# Altium PCB 6_LDCU_connector board(V21_zb).PcbDoc (part 2 of 4)
Units mil, origin at the board's own origin, x right, y up, seen from the top; angles counter-clockwise.
Board outline 11811.02 x 4135 mil, 2 copper layers (Top, Bottom), stack 12.7 mil thick; 37 components, 473 nets, 963 pads, 1 vias.
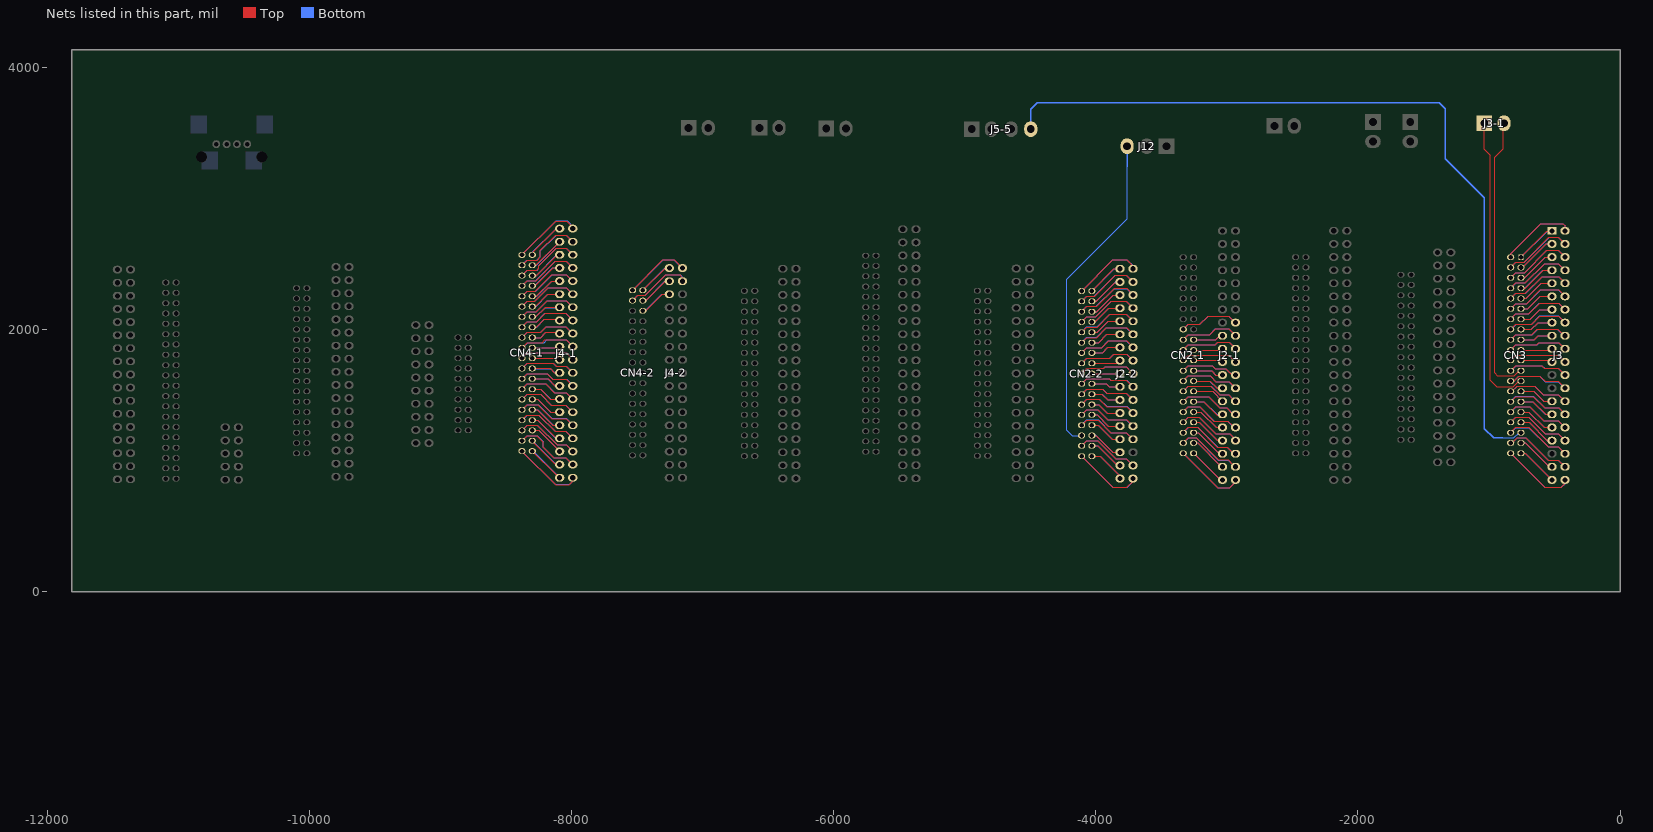
[diagram p2: the nets of this part, all layers, seen from the top]

## Via types
v1: diameter 20, hole 14, Top to Bottom, 1 vias

## Nets (pads, with @x,y where several pads share a name; then routed paths per layer and width w, separated by ;. In a path a pad name is that pad's centre, name@x,y a point inside that pad or via, vN(x,y) a via of type N, cw(c..) or ccw(c..) an arc to the next point about the centre after c; other vN are vias at no path point) (continued)
CN2-1_P16: CN2-1.16 J2-1.16 | length 925.3
  Top w7.87: CN2-1.16@-3333.03,2002.28 -3293.66,2041.65 -3205.47,2041.65 -3142.48,2104.65 -2984.21,2104.65 J2-1.16@-2933.82,2054.25
  Bottom w7.87: CN2-1.16@-3333.03,2002.28 -3293.66,2041.65 -3205.87,2041.65 -3142.87,2104.65 -2985,2104.65 -2934.21,2053.86 J2-1.16@-2933.82,2054.25
CN2-1_P17: CN2-1.17 J2-1.17 | length 466.4
  Top w7.87: CN2-1.17@-3254.29,1923.54 -3084.21,1923.54 -3053.5,1954.25 J2-1.17@-3033.82,1954.25
  Bottom w7.87: CN2-1.17@-3254.29,1923.54 -3083.82,1923.54 -3054.29,1953.07 -3035,1953.07 J2-1.17@-3033.82,1954.25
CN2-1_P18: CN2-1.18 J2-1.18 | length 910.3
  Top w7.87: CN2-1.18@-3333.03,1923.54 -3293.66,1962.91 -3129.88,1962.91 -3086.57,2006.22 -2985.79,2006.22 J2-1.18@-2933.82,1954.25
  Bottom w7.87: CN2-1.18@-3333.03,1923.54 -3293.66,1962.91 -3130.67,1962.91 -3086.97,2006.61 -2986.18,2006.61 J2-1.18@-2933.82,1954.25
CN2-1_P19: CN2-1.19 J2-1.19 | length 453.2
  Top w7.87: CN2-1.19@-3254.29,1844.8 -3043.27,1844.8 J2-1.19@-3033.82,1854.25
  Bottom w7.87: CN2-1.19@-3254.29,1844.8 -3035.79,1844.8 -3033.82,1846.77 J2-1.19@-3033.82,1854.25
CN2-1_P20: CN2-1.20 J2-1.20 | length 888.4
  Top w7.87: CN2-1.20@-3333.03,1844.8 -3293.66,1884.17 -3088.94,1884.17 -3069.25,1903.86 -2983.43,1903.86 J2-1.20@-2933.82,1854.25
  Bottom w7.87: CN2-1.20@-3333.03,1844.8 -3293.66,1884.17 -3088.15,1884.17 -3068.46,1903.86 -2983.43,1903.86 J2-1.20@-2933.82,1854.25
CN2-1_P21: CN2-1.21 J2-1.21 | length 452.3
  Top w7.87: CN2-1.21@-3254.29,1766.06 -3045.63,1766.06 J2-1.21@-3033.82,1754.25
  Bottom w7.87: CN2-1.21@-3254.29,1766.06 -3042.87,1766.06 -3042.87,1763.31 J2-1.21@-3033.82,1754.25
CN2-1_P22: CN2-1.22 J2-1.22 | length 872.8
  Top w7.87: CN2-1.22@-3333.03,1766.06 -3294.06,1805.04 -2984.61,1805.04 J2-1.22@-2933.82,1754.25
  Bottom w7.87: CN2-1.22@-3333.03,1766.06 -3294.06,1805.04 -2984.61,1805.04 J2-1.22@-2933.82,1754.25
CN2-1_P23: CN2-1.23 J2-1.23 | length 468.3
  Top w7.87: CN2-1.23@-3254.29,1687.32 -3116.5,1687.32 -3083.43,1654.25 J2-1.23@-3033.82,1654.25
  Bottom w7.87: CN2-1.23@-3254.29,1687.32 -3117.28,1687.32 -3084.21,1654.25 J2-1.23@-3033.82,1654.25
CN2-1_P24: CN2-1.24 J2-1.24 | length 898.2
  Top w7.87: CN2-1.24@-3333.03,1687.32 -3294.84,1725.51 -3111.38,1725.51 -3088.94,1703.07 -3010.2,1703.07 -2966.89,1659.76 -2939.33,1659.76 J2-1.24@-2933.82,1654.25
  Bottom w7.87: CN2-1.24@-3333.03,1687.32 -3294.45,1725.91 -3111.38,1725.91 -3088.54,1703.07 -3008.62,1703.07 -2949.17,1643.62 -2944.45,1643.62 J2-1.24@-2933.82,1654.25
CN2-1_P25: CN2-1.25 J2-1.25 | length 489.9
  Top w7.87: CN2-1.25@-3254.29,1608.58 -3128.31,1608.58 -3073.98,1554.25 J2-1.25@-3033.82,1554.25
  Bottom w7.87: CN2-1.25@-3254.29,1608.58 -3130.28,1608.58 -3077.91,1556.22 -3031.85,1556.22 J2-1.25@-3033.82,1554.25
CN2-1_P26: CN2-1.26 J2-1.26 | length 909.6
  Top w7.87: CN2-1.26@-3333.03,1608.58 -3293.27,1648.35 -3127.52,1648.35 -3083.43,1604.25 -2983.82,1604.25 J2-1.26@-2933.82,1554.25
  Bottom w7.87: CN2-1.26@-3333.03,1608.58 -3292.87,1648.74 -3127.13,1648.74 -3083.03,1604.65 -2984.21,1604.65 J2-1.26@-2933.82,1554.25
CN2-1_P27: CN2-1.27 J2-1.27 | length 514.7
  Top w7.87: CN2-1.27@-3254.29,1529.84 -3109.41,1529.84 J2-1.27@-3033.82,1454.25 J2-1.27@-3025.94,1446.38
  Bottom w7.87: CN2-1.27@-3254.29,1529.84 -3109.41,1529.84 J2-1.27@-3033.82,1454.25
CN2-1_P28: CN2-1.28 J2-1.28 | length 933.9
  Top w7.87: CN2-1.28@-3333.03,1529.84 -3292.87,1570 -3121.22,1570 -3054.29,1503.07 -2987.36,1503.07 -2959.02,1474.72 -2954.29,1474.72 J2-1.28@-2933.82,1454.25
  Bottom w7.87: CN2-1.28@-3333.03,1529.84 -3293.27,1569.61 -3120.83,1569.61 -3054.29,1503.07 -2987.36,1503.07 -2933.82,1449.53 J2-1.28@-2933.82,1454.25
CN2-1_P29: CN2-1.29 J2-1.29 | length 525.7
  Top w7.87: CN2-1.29@-3254.29,1451.1 -3175.55,1451.1 -3073.19,1348.74 -3039.33,1348.74 J2-1.29@-3033.82,1354.25
  Bottom w7.87: CN2-1.29@-3254.29,1451.1 -3174.76,1451.1 -3077.91,1354.25 J2-1.29@-3033.82,1354.25
CN2-1_P30: CN2-1.30 J2-1.30 | length 943.9
  Top w7.87: CN2-1.30@-3333.03,1451.1 -3293.66,1490.47 -3140.12,1490.47 -3053.5,1403.86 -3000.75,1403.86 -2953.5,1356.61 -2936.18,1356.61 J2-1.30@-2933.82,1354.25
  Bottom w7.87: CN2-1.30@-3333.03,1451.1 -3293.66,1490.47 -3140.12,1490.47 -3053.5,1403.86 -3001.14,1403.86 -2951.54,1354.25 J2-1.30@-2933.82,1354.25
CN2-1_P31: CN2-1.31 J2-1.31 | length 538.8
  Top w7.87: CN2-1.31@-3254.29,1372.36 -3199.17,1372.36 -3081.06,1254.25 J2-1.31@-3033.82,1254.25
  Bottom w7.87: CN2-1.31@-3254.29,1372.36 -3199.17,1372.36 -3081.06,1254.25 J2-1.31@-3033.82,1254.25
CN2-1_P32: CN2-1.32 J2-1.32 | length 967.1
  Top w7.87: CN2-1.32@-3333.03,1372.36 -3294.06,1411.34 -3206.65,1411.34 -3098.78,1303.46 -2992.48,1303.46 -2959.02,1270 -2949.57,1270 J2-1.32@-2933.82,1254.25
  Bottom w7.87: CN2-1.32@-3333.03,1372.36 -3294.06,1411.34 -3205.47,1411.34 -3097.6,1303.46 -2993.27,1303.46 -2957.83,1268.03 -2936.97,1268.03 -2936.97,1257.4 J2-1.32@-2933.82,1254.25
CN2-1_P33: CN2-1.33 J2-1.33 | length 562.4
  Top w7.87: CN2-1.33@-3254.29,1293.62 -3210.98,1293.62 -3073.19,1155.83 -3037.76,1155.83 J2-1.33@-3033.82,1154.25
  Bottom w7.87: CN2-1.33@-3254.29,1293.62 -3209.8,1293.62 -3073.58,1157.4 -3030.67,1157.4 J2-1.33@-3033.82,1154.25
CN2-1_P34: CN2-1.34 J2-1.34 | length 990.1
  Top w7.87: CN2-1.34@-3333.03,1293.62 -3293.66,1332.99 -3210.98,1332.99 -3083.03,1205.04 -2976.73,1205.04 -2933.82,1162.13 J2-1.34@-2933.82,1154.25
  Bottom w7.87: CN2-1.34@-3333.03,1293.62 -3294.06,1332.6 -3211.38,1332.6 -3083.82,1205.04 -2977.13,1205.04 -2931.06,1158.98 -2931.06,1157.01 J2-1.34@-2933.82,1154.25
CN2-1_P35: CN2-1.35 J2-1.35 | length 574
  Top w7.87: CN2-1.35@-3254.29,1214.88 -3218.86,1214.88 -3058.23,1054.25 J2-1.35@-3033.82,1054.25
  Bottom w7.87: CN2-1.35@-3254.29,1214.88 -3220.04,1214.88 -3059.41,1054.25 J2-1.35@-3033.82,1054.25
CN2-1_P36: CN2-1.36 J2-1.36 | length 1007.1
  Top w7.87: CN2-1.36@-3333.03,1214.88 -3293.66,1254.25 -3222.8,1254.25 -3072.01,1103.46 -2997.2,1103.46 -2966.89,1073.15 -2952.72,1073.15 J2-1.36@-2933.82,1054.25
  Bottom w7.87: CN2-1.36@-3333.03,1214.88 -3292.48,1255.43 -3222.01,1255.43 -3069.65,1103.07 -2996.81,1103.07 -2939.13,1045.39 -2933.82,1050.71 J2-1.36@-2933.82,1054.25
CN2-1_P37: CN2-1.37 J2-1.37 | length 594.6
  Top w7.87: CN2-1.37@-3254.29,1136.14 -3222.8,1136.14 -3053.5,966.85 -3046.42,966.85 J2-1.37@-3033.82,954.25
  Bottom w7.87: CN2-1.37@-3254.29,1136.14 -3222.8,1136.14 -3037.36,950.71 J2-1.37@-3033.82,954.25
CN2-1_P38: CN2-1.38 J2-1.38 | length 1018.6
  Top w7.87: CN2-1.38@-3333.03,1136.14 -3292.87,1176.3 -3235,1176.3 -3064.92,1006.22 -2990.51,1006.22 -2959.02,974.72 -2954.29,974.72 J2-1.38@-2933.82,954.25
  Bottom w7.87: CN2-1.38@-3333.03,1136.14 -3292.09,1177.09 -3235.39,1177.09 -3064.13,1005.83 -2990.91,1005.83 -2936.57,951.5 J2-1.38@-2933.82,954.25
CN2-1_P39: CN2-1.39 J2-1.39 | length 620.2
  Top w7.87: CN2-1.39@-3254.29,1057.4 -3051.14,854.25 J2-1.39@-3033.82,854.25
  Bottom w7.87: CN2-1.39@-3254.29,1057.4 -3059.41,862.52 -3029.49,862.52 -3029.49,858.58 J2-1.39@-3033.82,854.25
CN2-1_P40: CN2-1.40 J2-1.40 | length 1085.3
  Top w7.87: CN2-1.40@-3333.03,1057.4 -3071.22,795.59 -2977.52,795.59 -2933.82,839.29 J2-1.40@-2933.82,854.25
  Bottom w7.87: CN2-1.40@-3333.03,1057.4 -3071.22,795.59 -2978.7,795.59 -2928.7,845.59 -2934.21,851.1 -2933.82,851.5 J2-1.40@-2933.82,854.25
CN2-2_P1: CN2-2.1 J2-2.1 | length 567.8
  Top w7.87: CN2-2.1@-4029.53,2295.35 -3861.42,2463.46 -3816.93,2463.46 J2-2.1@-3815.75,2464.65
  Bottom w7.87: CN2-2.1@-4029.53,2295.35 -3860.24,2464.65 J2-2.1@-3815.75,2464.65
CN2-2_P2: CN2-2.2 J2-2.2 | length 1064.9
  Top w7.87: CN2-2.2@-4108.27,2295.35 -3869.69,2533.94 -3764.17,2533.94 -3715.75,2485.51 J2-2.2@-3715.75,2464.65
  Bottom w7.87: CN2-2.2@-4108.27,2295.35 -3870.08,2533.54 -3762.6,2533.54 -3715.75,2486.69 J2-2.2@-3715.75,2464.65
CN2-2_P3: CN2-2.3 J2-2.3 | length 554.1
  Top w7.87: CN2-2.3@-4029.53,2216.61 -3998.03,2216.61 -3856.3,2358.35 -3822.05,2358.35 J2-2.3@-3815.75,2364.65
  Bottom w7.87: CN2-2.3@-4029.53,2216.61 -3998.03,2216.61 -3845.28,2369.37 -3840.55,2364.65 J2-2.3@-3815.75,2364.65
CN2-2_P4: CN2-2.4 J2-2.4 | length 992.1
  Top w7.87: CN2-2.4@-4108.27,2216.61 -4068.9,2255.98 -4009.84,2255.98 -3850,2415.83 -3766.93,2415.83 J2-2.4@-3715.75,2364.65
  Bottom w7.87: CN2-2.4@-4108.27,2216.61 -4068.9,2255.98 -4010.24,2255.98 -3850.79,2415.43 -3766.54,2415.43 J2-2.4@-3715.75,2364.65
CN2-2_P5: CN2-2.5 J2-2.5 | length 532.6
  Top w7.87: CN2-2.5@-4029.53,2137.87 -3994.09,2137.87 -3867.32,2264.65 J2-2.5@-3815.75,2264.65
  Bottom w7.87: CN2-2.5@-4029.53,2137.87 -3993.7,2137.87 -3866.93,2264.65 J2-2.5@-3815.75,2264.65
CN2-2_P6: CN2-2.6 J2-2.6 | length 972.6
  Top w7.87: CN2-2.6@-4108.27,2137.87 -4068.9,2177.24 -3994.09,2177.24 -3856.69,2314.65 -3765.75,2314.65 J2-2.6@-3715.75,2264.65
  Bottom w7.87: CN2-2.6@-4108.27,2137.87 -4068.9,2177.24 -3995.28,2177.24 -3858.27,2314.25 -3765.35,2314.25 J2-2.6@-3715.75,2264.65
CN2-2_P7: CN2-2.7 J2-2.7 | length 515
  Top w7.87: CN2-2.7@-4029.53,2059.13 -4005.51,2059.13 -3900,2164.65 J2-2.7@-3815.75,2164.65
  Bottom w7.87: CN2-2.7@-4029.53,2059.13 -4005.51,2059.13 -3900,2164.65 J2-2.7@-3815.75,2164.65
CN2-2_P8: CN2-2.8 J2-2.8 | length 959.5
  Top w7.87: CN2-2.8@-4108.27,2059.13 -4068.9,2098.5 -3998.43,2098.5 -3880.31,2216.61 -3767.72,2216.61 J2-2.8@-3715.75,2164.65
  Bottom w7.87: CN2-2.8@-4108.27,2059.13 -4069.29,2098.11 -4000.39,2098.11 -3880.71,2217.8 -3768.9,2217.8 J2-2.8@-3715.75,2164.65
CN2-2_P9: CN2-2.9 J2-2.9 | length 497.4
  Top w7.87: CN2-2.9@-4029.53,1980.39 -3990.16,1980.39 -3905.91,2064.65 J2-2.9@-3815.75,2064.65
  Bottom w7.87: CN2-2.9@-4029.53,1980.39 -3990.55,1980.39 -3906.3,2064.65 J2-2.9@-3815.75,2064.65
CN2-2_P10: CN2-2.10 J2-2.10 | length 940.3
  Top w7.87: CN2-2.10@-4108.27,1980.39 -4068.11,2020.55 -3988.98,2020.55 -3893.31,2116.22 -3767.32,2116.22 J2-2.10@-3715.75,2064.65
  Bottom w7.87: CN2-2.10@-4108.27,1980.39 -4067.72,2020.94 -3988.19,2020.94 -3892.91,2116.22 -3767.32,2116.22 J2-2.10@-3715.75,2064.65
CN2-2_P11: CN2-2.11 J2-2.11 | length 479.7
  Top w7.87: CN2-2.11@-4029.53,1901.65 -3978.35,1901.65 -3915.35,1964.65 J2-2.11@-3815.75,1964.65
  Bottom w7.87: CN2-2.11@-4029.53,1901.65 -3978.74,1901.65 -3915.75,1964.65 J2-2.11@-3815.75,1964.65
CN2-2_P12: CN2-2.12 J2-2.12 | length 920.4
  Top w7.87: CN2-2.12@-4108.27,1901.65 -4069.29,1940.63 -3994.49,1940.63 -3920.47,2014.65 -3765.75,2014.65 J2-2.12@-3715.75,1964.65
  Bottom w7.87: CN2-2.12@-4108.27,1901.65 -4068.9,1941.02 -3994.09,1941.02 -3920.08,2015.04 -3766.14,2015.04 J2-2.12@-3715.75,1964.65
CN2-2_P13: CN2-2.13 J2-2.13 | length 462.1
  Top w7.87: CN2-2.13@-4029.53,1822.91 -3948.82,1822.91 -3907.09,1864.65 J2-2.13@-3815.75,1864.65
  Bottom w7.87: CN2-2.13@-4029.53,1822.91 -3948.82,1822.91 -3907.09,1864.65 J2-2.13@-3815.75,1864.65
CN2-2_P14: CN2-2.14 J2-2.14 | length 902.5
  Top w7.87: CN2-2.14@-4108.27,1822.91 -4068.9,1862.28 -3954.72,1862.28 -3902.76,1914.25 -3765.35,1914.25 J2-2.14@-3715.75,1864.65
  Bottom w7.87: CN2-2.14@-4108.27,1822.91 -4068.9,1862.28 -3956.3,1862.28 -3903.54,1915.04 -3766.14,1915.04 J2-2.14@-3715.75,1864.65
CN2-2_P15: CN2-2.15 J2-2.15 | length 462.1
  Top w7.87: CN2-2.15@-4029.53,1744.17 -3836.22,1744.17 J2-2.15@-3815.75,1764.65
  Bottom w7.87: CN2-2.15@-4029.53,1744.17 -3811.81,1744.17 -3815.75,1748.11 J2-2.15@-3815.75,1764.65
CN2-2_P16: CN2-2.16 J2-2.16 | length 884.8
  Top w7.87: CN2-2.16@-4108.27,1744.17 -4068.5,1783.94 -3895.28,1783.94 -3864.57,1814.65 -3765.75,1814.65 J2-2.16@-3715.75,1764.65
  Bottom w7.87: CN2-2.16@-4108.27,1744.17 -4068.5,1783.94 -3894.88,1783.94 -3864.17,1814.65 -3765.75,1814.65 J2-2.16@-3715.75,1764.65
CN2-2_P17: CN2-2.17 J2-2.17 | length 428.7
  Top w7.87: CN2-2.17@-4029.53,1665.43 -3815.75,1665.43 J2-2.17@-3815.75,1664.65
  Bottom w7.87: CN2-2.17@-4029.53,1665.43 -4028.74,1664.65 J2-2.17@-3815.75,1664.65
CN2-2_P18: CN2-2.18 J2-2.18 | length 869.8
  Top w7.87: CN2-2.18@-4108.27,1665.43 -4068.9,1704.8 -3938.98,1704.8 -3927.95,1715.83 -3766.93,1715.83 J2-2.18@-3715.75,1664.65
  Bottom w7.87: CN2-2.18@-4108.27,1665.43 -4069.29,1704.41 -3939.76,1704.41 -3927.56,1716.61 -3767.72,1716.61 J2-2.18@-3715.75,1664.65
CN2-2_P19: CN2-2.19 J2-2.19 | length 445.8
  Top w7.87: CN2-2.19@-4029.53,1586.69 -3919.29,1586.69 -3897.24,1564.65 J2-2.19@-3815.75,1564.65
  Bottom w7.87: CN2-2.19@-4029.53,1586.69 -3918.9,1586.69 -3896.85,1564.65 J2-2.19@-3815.75,1564.65
CN2-2_P20: CN2-2.20 J2-2.20 | length 869.8
  Top w7.87: CN2-2.20@-4108.27,1586.69 -4067.72,1627.24 -3896.85,1627.24 -3884.65,1615.04 -3766.14,1615.04 J2-2.20@-3715.75,1564.65
  Bottom w7.87: CN2-2.20@-4108.27,1586.69 -4068.5,1626.46 -3896.06,1626.46 -3884.25,1614.65 -3765.75,1614.65 J2-2.20@-3715.75,1564.65
CN2-2_P21: CN2-2.21 J2-2.21 | length 463.4
  Top w7.87: CN2-2.21@-4029.53,1507.95 -3953.15,1507.95 -3909.84,1464.65 J2-2.21@-3815.75,1464.65
  Bottom w7.87: CN2-2.21@-4029.53,1507.95 -4028.74,1507.17 -3951.97,1507.17 -3909.45,1464.65 J2-2.21@-3815.75,1464.65
CN2-2_P22: CN2-2.22 J2-2.22 | length 886.5
  Top w7.87: CN2-2.22@-4108.27,1507.95 -4068.9,1547.32 -3946.85,1547.32 -3914.57,1515.04 -3766.14,1515.04 J2-2.22@-3715.75,1464.65
  Bottom w7.87: CN2-2.22@-4108.27,1507.95 -4068.5,1547.72 -3947.24,1547.72 -3914.57,1515.04 -3766.14,1515.04 J2-2.22@-3715.75,1464.65
CN2-2_P23: CN2-2.23 J2-2.23 | length 481
  Top w7.87: CN2-2.23@-4029.53,1429.21 -3976.38,1429.21 -3911.81,1364.65 J2-2.23@-3815.75,1364.65
  Bottom w7.87: CN2-2.23@-4029.53,1429.21 -3977.17,1429.21 -3912.6,1364.65 J2-2.23@-3815.75,1364.65
CN2-2_P24: CN2-2.24 J2-2.24 | length 904.7
  Top w7.87: CN2-2.24@-4108.27,1429.21 -4068.9,1468.58 -3972.83,1468.58 -3917.72,1413.46 -3764.57,1413.46 J2-2.24@-3715.75,1364.65
  Bottom w7.87: CN2-2.24@-4108.27,1429.21 -4067.72,1469.76 -3973.23,1469.76 -3918.11,1414.65 -3765.75,1414.65 J2-2.24@-3715.75,1364.65
CN2-2_P25: CN2-2.25 J2-2.25 | length 498.7
  Top w7.87: CN2-2.25@-4029.53,1350.47 -3988.98,1350.47 -3903.15,1264.65 J2-2.25@-3815.75,1264.65
  Bottom w7.87: CN2-2.25@-4029.53,1350.47 -3989.37,1350.47 -3903.54,1264.65 J2-2.25@-3815.75,1264.65
CN2-2_P26: CN2-2.26 J2-2.26 | length 921.4
  Top w7.87: CN2-2.26@-4108.27,1350.47 -4068.9,1389.84 -3986.22,1389.84 -3910.63,1314.25 -3765.35,1314.25 J2-2.26@-3715.75,1264.65
  Bottom w7.87: CN2-2.26@-4108.27,1350.47 -4068.9,1389.84 -3985.43,1389.84 -3910.63,1315.04 -3766.14,1315.04 J2-2.26@-3715.75,1264.65
CN2-2_P27: CN2-2.27 J2-2.27 | length 516.6
  Top w7.87: CN2-2.27@-4029.53,1271.73 -3982.28,1271.73 -3875.98,1165.43 -3816.54,1165.43 J2-2.27@-3815.75,1164.65
  Bottom w7.87: CN2-2.27@-4029.53,1271.73 -4029.13,1272.13 -3982.68,1272.13 -3875.2,1164.65 J2-2.27@-3815.75,1164.65
CN2-2_P28: CN2-2.28 J2-2.28 | length 939.6
  Top w7.87: CN2-2.28@-4108.27,1271.73 -4068.9,1311.1 -3982.28,1311.1 -3886.22,1215.04 -3766.14,1215.04 J2-2.28@-3715.75,1164.65
  Bottom w7.87: CN2-2.28@-4108.27,1271.73 -4068.11,1311.89 -3983.07,1311.89 -3886.22,1215.04 -3766.14,1215.04 J2-2.28@-3715.75,1164.65
CN2-2_P29: CN2-2.29 J2-2.29 | length 548.4
  Top w7.87: CN2-2.29@-4029.53,1192.99 -3998.03,1192.99 -3869.69,1064.65 J2-2.29@-3815.75,1064.65
  Bottom w7.87: CN2-2.29@-4029.53,1192.99 -4031.1,1194.57 -4031.1,1201.65 -4007.09,1201.65 -3870.08,1064.65 J2-2.29@-3815.75,1064.65
CN2-2_P30: CN2-2.30 J12.3 | length 2485.7
  Bottom w7.87: CN2-2.30@-4108.27,1192.99 -4179.02,1192.99 -4221.02,1235 -4221.02,2385 -3761.02,2845 -3761.02,3245
  Bottom w10: -3761.02,3245 J12.3@-3761.02,3400
CN2-2_P31: CN2-2.31 J2-2.31 | length 551.5
  Top w7.87: CN2-2.31@-4029.53,1114.25 -3986.22,1114.25 -3848.43,976.46 -3827.56,976.46 J2-2.31@-3815.75,964.65
  Bottom w7.87: CN2-2.31@-4029.53,1114.25 -3984.25,1114.25 -3834.65,964.65 J2-2.31@-3815.75,964.65
CN2-2_P32: CN2-2.32 J2-2.32 | length 974.5
  Top w7.87: CN2-2.32@-4108.27,1114.25 -4068.9,1153.62 -3986.22,1153.62 -3848.43,1015.83 -3766.93,1015.83 J2-2.32@-3715.75,964.65
  Bottom w7.87: CN2-2.32@-4108.27,1114.25 -4068.5,1154.02 -3986.22,1154.02 -3848.03,1015.83 -3766.93,1015.83 J2-2.32@-3715.75,964.65
CN2-2_P33: CN2-2.33 J2-2.33 | length 595.6
  Top w7.87: CN2-2.33@-4029.53,1035.51 -3966.54,1035.51 -3815.75,884.72 J2-2.33@-3815.75,864.65
  Bottom w7.87: CN2-2.33@-4029.53,1035.51 -3965.35,1035.51 -3812.99,883.15 -3812.99,867.4 J2-2.33@-3815.75,864.65
CN2-2_P34: CN2-2.34 J2-2.34 | length 1058.6
  Top w7.87: CN2-2.34@-4108.27,1035.51 -3871.65,798.9 -3762.2,798.9 -3715.75,845.35 J2-2.34@-3715.75,864.65
  Bottom w7.87: CN2-2.34@-4108.27,1035.51 -3871.65,798.9 -3761.42,798.9 -3715.75,844.57 J2-2.34@-3715.75,864.65
CN3_P1: CN3.1 J3.1 | length 600.6
  Top w7.87: CN3.1@-756.57,2553.46 -559.72,2750.32 -524.29,2750.32 J3.1@-520.35,2754.25
  Bottom w7.87: CN3.1@-756.57,2553.46 -557.76,2752.28
CN3_P2: CN3.2 J3.2 | length 1167.9
  Top w7.87: CN3.2@-836.02,2554.17 -836.02,2580 -606.02,2810 -436.02,2810 -420.35,2794.33 J3.2@-420.35,2754.25
  Bottom w7.87: CN3.2@-834.53,2553.46 CN3.2@-835.31,2553.46 -835.31,2580.71 -606.02,2810 -436.02,2810 -420.35,2794.33 J3.2@-420.35,2754.25
CN3_P3: CN3.3 J3.3 | length 621.2
  Top w7.87: CN3.3@-756.57,2474.72 -742.01,2474.72 -562.48,2654.25 J3.3@-520.35,2654.25
  Bottom w7.87: CN3.3@-756.57,2474.72 -741.61,2474.72 -562.09,2654.25 J3.3@-520.35,2654.25
CN3_P4: CN3.4 J3.4 | length 1062.1
  Top w7.87: CN3.4@-835.31,2474.72 -795.04,2515 -732.44,2515 -542.8,2704.65 -470.75,2704.65 J3.4@-420.35,2654.25
  Bottom w7.87: CN3.4@-835.31,2474.72 -795.04,2515 -731.65,2515 -542.01,2704.65 -470.75,2704.65 J3.4@-420.35,2654.25
CN3_P5: CN3.5 J3.5 | length 603.6
  Top w7.87: CN3.5@-756.57,2395.98 -729.02,2395.98 -570.75,2554.25 J3.5@-520.35,2554.25
  Bottom w7.87: CN3.5@-756.57,2395.98 -729.02,2395.98 -570.75,2554.25 J3.5@-520.35,2554.25
CN3_P6: CN3.6 J3.6 | length 1044.5
  Top w7.87: CN3.6@-835.31,2395.98 -795.94,2435.35 -729.02,2435.35 -559.72,2604.65 -470.75,2604.65 J3.6@-420.35,2554.25
  Bottom w7.87: CN3.6@-835.31,2395.98 -795.94,2435.35 -729.41,2435.35 -560.12,2604.65 -470.75,2604.65 J3.6@-420.35,2554.25
CN3_P7: CN3.7 J3.7 | length 585.9
  Top w7.87: CN3.7@-756.57,2317.24 -725.08,2317.24 -588.07,2454.25 J3.7@-520.35,2454.25
  Bottom w7.87: CN3.7@-756.57,2317.24 -725.87,2317.24 -588.86,2454.25 J3.7@-520.35,2454.25
CN3_P8: CN3.8 J3.8 | length 1027.5
  Top w7.87: CN3.8@-835.31,2317.24 -795.94,2356.61 -724.41,2356.61 -576.02,2505 -471.1,2505 J3.8@-420.35,2454.25
  Bottom w7.87: CN3.8@-835.31,2317.24 -833.35,2317.24 -793.58,2357.01 -724.02,2357.01 -576.02,2505 -471.1,2505 J3.8@-420.35,2454.25
CN3_P9: CN3.9 J3.9 | length 568.3
  Top w7.87: CN3.9@-756.57,2238.5 -717.2,2238.5 -601.46,2354.25 J3.9@-520.35,2354.25
  Bottom w7.87: CN3.9@-756.57,2238.5 -717.6,2238.5 -601.85,2354.25 J3.9@-520.35,2354.25
CN3_P10: CN3.10 J3.10 | length 1007.7
  Top w7.87: CN3.10@-835.31,2238.5 -797.13,2276.69 -722.32,2276.69 -595.55,2403.46 -469.57,2403.46 J3.10@-420.35,2354.25
  Bottom w7.87: CN3.10@-835.31,2238.5 -795.94,2277.87 -719.96,2277.87 -593.98,2403.86 -469.96,2403.86 J3.10@-420.35,2354.25
CN3_P11: CN3.11 J3.11 | length 550.7
  Top w7.87: CN3.11@-756.57,2159.76 -705.39,2159.76 -610.91,2254.25 J3.11@-520.35,2254.25
  Bottom w7.87: CN3.11@-756.57,2159.76 -705,2159.76 -610.51,2254.25 J3.11@-520.35,2254.25
CN3_P12: CN3.12 J3.12 | length 992.8
  Top w7.87: CN3.12@-835.31,2159.76 -795.94,2199.13 -713.27,2199.13 -608.15,2304.25 -467.99,2304.25 -437.68,2273.94 -437.68,2271.57 J3.12@-420.35,2254.25
  Bottom w7.87: CN3.12@-835.31,2159.76 -795.94,2199.13 -712.87,2199.13 -607.36,2304.65 -470.75,2304.65 J3.12@-420.35,2254.25
CN3_P13: CN3.13 J3.13 | length 533.1
  Top w7.87: CN3.13@-756.57,2081.02 -685.71,2081.02 -612.48,2154.25 J3.13@-520.35,2154.25
  Bottom w7.87: CN3.13@-756.57,2081.02 -685.71,2081.02 -612.48,2154.25 J3.13@-520.35,2154.25
CN3_P14: CN3.14 J3.14 | length 970.8
  Top w7.87: CN3.14@-835.31,2081.02 -795.94,2120.39 -695.63,2120.39 -612.95,2203.07 -469.17,2203.07 J3.14@-420.35,2154.25
  Bottom w7.87: CN3.14@-835.31,2081.02 -796.34,2120 -699.09,2120 -616.81,2202.28 -468.39,2202.28 J3.14@-420.35,2154.25
CN3_P15: CN3.15 J3.15 | length 515.5
  Top w7.87: CN3.15@-756.57,2002.28 -677.83,2002.28 -625.87,2054.25 J3.15@-520.35,2054.25
  Bottom w7.87: CN3.15@-756.57,2002.28 -677.05,2002.28 -625.08,2054.25 J3.15@-520.35,2054.25
CN3_P16: CN3.16 J3.16 | length 955.8
  Top w7.87: CN3.16@-835.31,2002.28 -794.76,2042.83 -675.87,2042.83 -615.24,2103.46 -469.57,2103.46 J3.16@-420.35,2054.25
  Bottom w7.87: CN3.16@-835.31,2002.28 -794.37,2043.23 -675.87,2043.23 -614.09,2105 -471.1,2105 J3.16@-420.35,2054.25
CN3_P17: CN3.17 J3.17 | length 497.9
  Top w7.87: CN3.17@-756.57,1923.54 -653.82,1923.54 -623.11,1954.25 J3.17@-520.35,1954.25
  Bottom w7.87: CN3.17@-756.57,1923.54 -653.43,1923.54 -623.5,1953.46 -521.14,1953.46 J3.17@-520.35,1954.25
CN3_P18: CN3.18 J3.18 | length 939.2
  Top w7.87: CN3.18@-835.31,1923.54 -795.94,1962.91 -673.11,1962.91 -631.38,2004.65 -475.47,2004.65 -437.68,1966.85 -432.95,1966.85 J3.18@-420.35,1954.25
  Bottom w7.87: CN3.18@-835.31,1923.54 -795.94,1962.91 -672.32,1962.91 -630.2,2005.04 -479.41,2005.04 -428.62,1954.25 J3.18@-420.35,1954.25
CN3_P19: CN3.19 J3.19 | length 492.4
  Top w7.87: CN3.19@-756.57,1844.8 -524.29,1844.8 -520.35,1848.74 J3.19@-520.35,1854.25
  Bottom w7.87: CN3.19@-756.57,1844.8 -517.99,1844.8 -520.35,1847.17 J3.19@-520.35,1854.25
CN3_P20: CN3.20 J3.20 | length 917.3
  Top w7.87: CN3.20@-835.31,1844.8 -794.76,1885.35 -636.5,1885.35 -619.57,1902.28 -468.39,1902.28 J3.20@-420.35,1854.25
  Bottom w7.87: CN3.20@-835.31,1844.8 -795.16,1884.96 -633.35,1884.96 -616.02,1902.28 -468.39,1902.28 J3.20@-420.35,1854.25
CN3_P21: CN3.21 J3.21 | length 484.8
  Top w7.87: CN3.21@-756.57,1766.06 -528.23,1766.06 -520.35,1758.19 J3.21@-520.35,1754.25
  Bottom w7.87: CN3.21@-756.57,1766.06 -531.77,1766.06 -526.65,1760.94 -526.65,1760.55 J3.21@-520.35,1754.25
CN3_P22: CN3.22 J3.22 | length 903.6
  Top w7.87: CN3.22@-835.31,1766.06 -796.73,1804.65 -470.75,1804.65 J3.22@-420.35,1754.25
  Bottom w7.87: CN3.22@-835.31,1766.06 -796.73,1804.65 -470.75,1804.65 J3.22@-420.35,1754.25
CN3_P23: CN3.23 J3-1.2 | length 2169.6
  Top w7.87: J3-1.2@-856.02,3575 -891.02,3540 -891.02,3380 -956.02,3315 -956.02,1670 -936.02,1650 -806.02,1650 -768.7,1687.32 CN3.23@-756.57,1687.32
CN3_P24: CN3.24 J3.24 | length 922.5
  Top w7.87: CN3.24@-835.31,1687.32 -795.94,1726.69 -599.09,1726.69 -577.44,1705.04 -471.14,1705.04 J3.24@-420.35,1654.25
  Bottom w7.87: CN3.24@-835.31,1687.32 -833.35,1687.32 -793.98,1726.69 -596.73,1726.69 -575.08,1705.04 -471.14,1705.04 J3.24@-420.35,1654.25
CN3_P25: CN3.25 J3-1.1 | length 2251.9
  Top w7.87: J3-1.1@-1036.02,3575 -1036.02,3375 -991.02,3330 -991.02,1615 -941.02,1565 -816.02,1565 -772.44,1608.58 CN3.25@-756.57,1608.58
CN3_P26: CN3.26 J3.26 | length 937.1
  Top w7.87: CN3.26@-835.31,1608.58 -812.87,1608.58 -775.38,1646.08 -611.79,1646.08 -570.75,1605.04 -471.14,1605.04 J3.26@-420.35,1554.25
  Bottom w7.87: CN3.26@-835.31,1608.58 -811.3,1608.58 -773.8,1646.08 -611.79,1646.08 -570.35,1604.65 -470.75,1604.65 J3.26@-420.35,1554.25
CN3_P27: CN3.27 J3.27 | length 535.1
  Top w7.87: CN3.27@-756.57,1529.84 -658.15,1529.84 -582.56,1454.25 J3.27@-520.35,1454.25
  Bottom w7.87: CN3.27@-756.57,1529.84 -657.76,1529.84 -582.17,1454.25 J3.27@-520.35,1454.25
CN3_P28: CN3.28 J3.28 | length 958.1
  Top w7.87: CN3.28@-835.31,1529.84 -826.18,1529.84 -786.81,1569.21 -650.28,1569.21 -586.1,1505.04 -471.14,1505.04 J3.28@-420.35,1454.25
  Bottom w7.87: CN3.28@-835.31,1529.84 -826.18,1529.84 -786.42,1569.61 -651.06,1569.61 -586.89,1505.43 -471.54,1505.43 J3.28@-420.35,1454.25
CN3_P29: CN3.29 J3.29 | length 552.7
  Top w7.87: CN3.29@-756.57,1451.1 -666.02,1451.1 -569.17,1354.25 J3.29@-520.35,1354.25
  Bottom w7.87: CN3.29@-756.57,1451.1 -667.6,1451.1 -570.75,1354.25 J3.29@-520.35,1354.25
CN3_P30: CN3.30 J3.30 | length 976
  Top w7.87: CN3.30@-835.31,1451.1 -795.94,1490.47 -662.09,1490.47 -575.08,1403.46 -469.57,1403.46 J3.30@-420.35,1354.25
  Bottom w7.87: CN3.30@-835.31,1451.1 -795.16,1491.26 -664.45,1491.26 -576.65,1403.46 -469.57,1403.46 J3.30@-420.35,1354.25
CN3_P31: CN3.31 J3.31 | length 570.3
  Top w7.87: CN3.31@-756.57,1372.36 -697.52,1372.36 -579.41,1254.25 J3.31@-520.35,1254.25
  Bottom w7.87: CN3.31@-756.57,1372.36 -697.91,1372.36 -579.8,1254.25 J3.31@-520.35,1254.25
CN3_P32: CN3.32 J3.32 | length 993.4
  Top w7.87: CN3.32@-835.31,1372.36 -795.94,1411.73 -689.65,1411.73 -582.95,1305.04 -471.14,1305.04 J3.32@-420.35,1254.25
  Bottom w7.87: CN3.32@-835.31,1372.36 -797.52,1410.16 -797.52,1411.34 -688.86,1411.34 -583.35,1305.83 -471.93,1305.83 J3.32@-420.35,1254.25
CN3_P33: CN3.33 J3.33 | length 587.9
  Top w7.87: CN3.33@-756.57,1293.62 -694.37,1293.62 -555,1154.25 J3.33@-520.35,1154.25
  Bottom w7.87: CN3.33@-756.57,1293.62 -694.37,1293.62 -555,1154.25 J3.33@-520.35,1154.25
CN3_P34: CN3.34 J3.34 | length 1010.9
  Top w7.87: CN3.34@-835.31,1293.62 -795.94,1332.99 -697.52,1332.99 -569.57,1205.04 -471.14,1205.04 J3.34@-420.35,1154.25
  Bottom w7.87: CN3.34@-835.31,1293.62 -795.55,1333.39 -697.91,1333.39 -569.57,1205.04 -471.14,1205.04 J3.34@-420.35,1154.25
CN3_P35: CN3.35 J5-5.4 | length 6238.6
  Bottom w8: -896.02,1175 -811.02,1175 -771.14,1214.88 CN3.35@-756.57,1214.88
  Bottom w10: J5-5.4@-4496.02,3530 -4496.02,3680 -4446.02,3730 -1381.02,3730 -1336.02,3685 -1336.02,3305 -1036.02,3005 -1036.02,1245 -966.02,1175 -896.02,1175
CN3_P36: CN3.36 J3.36 | length 1027.9
  Top w7.87: CN3.36@-835.31,1214.88 -795.94,1254.25 -695.94,1254.25 -547.13,1105.43 -471.54,1105.43 J3.36@-420.35,1054.25
  Bottom w7.87: CN3.36@-835.31,1214.88 -796.34,1253.86 -695.94,1253.86 -547.91,1105.83 -471.93,1105.83 J3.36@-420.35,1054.25
CN3_P37: CN3.37 J3.37 | length 623.1
  Top w7.87: CN3.37@-756.57,1136.14 -722.17,1136.14 -540.28,954.25 J3.37@-520.35,954.25
  Bottom w7.87: CN3.37@-756.57,1136.14 -722.17,1136.14 -540.28,954.25 J3.37@-520.35,954.25
CN3_P38: CN3.38 J3.38 | length 1045.8
  Top w7.87: CN3.38@-835.31,1136.14 -824.88,1136.14 -785.51,1175.51 -721.54,1175.51 -550.28,1004.25 -470.35,1004.25 J3.38@-420.35,954.25
  Bottom w7.87: CN3.38@-835.31,1136.14 -824.88,1136.14 -785.51,1175.51 -721.54,1175.51 -550.28,1004.25 -470.35,1004.25 J3.38@-420.35,954.25
CN3_P39: CN3.39 J3.39 | length 651.6
  Top w7.87: CN3.39@-756.57,1057.4 -723.5,1057.4 J3.39@-520.35,854.25
  Bottom w7.87: CN3.39@-756.57,1057.4 -724.29,1057.4 -536.89,870 -536.89,853.07 -521.54,853.07 J3.39@-520.35,854.25
CN3_P40: CN3.40 J3.40 | length 1129.2
  Top w7.87: CN3.40@-835.31,1057.4 -575.47,797.56 -449.49,797.56 -414.06,832.99 -414.06,847.95 J3.40@-420.35,854.25
  Bottom w7.87: CN3.40@-835.31,1057.4 -576.26,798.35 -448.31,798.35 -420.35,826.3 J3.40@-420.35,854.25
CN4-1_P1: CN4-1.1 J4-1.1 | length 620.3
  Top w7.87: CN4-1.1@-8298.5,2570.47 -8298.5,2588.58 -8115.83,2771.26 J4-1.1@-8089.84,2771.26
  Bottom w7.87: CN4-1.1@-8292.6,2568.5 -8296.54,2568.5 CN4-1.1@-8298.5,2570.47 -8298.5,2589.37 -8119.76,2768.11 J4-1.1@-8086.69,2768.11 ; J4-1.1@-8089.84,2771.26 J4-1.1@-8086.69,2768.11 ; J4-1.1@-8084.72,2768.11 J4-1.1@-8086.69,2768.11
CN4-1_P2: CN4-1.2 J4-1.2 | length 1055.7
  Top w7.87: CN4-1.2@-8377.24,2570.47 -8121.34,2826.38 -8034.72,2826.38 -7989.84,2781.5 J4-1.2@-7989.84,2771.26
  Bottom w7.87: CN4-1.2@-8377.24,2570.47 -8117.4,2830.32 -8032.76,2830.32 -7984.33,2781.89 -7984.33,2776.77 J4-1.2@-7989.84,2771.26
CN4-1_P3: CN4-1.3 J4-1.3 | length 566
  Top w7.87: CN4-1.3@-8298.5,2491.73 -8270.94,2491.73 -8105.59,2657.09 -8104.02,2657.09 J4-1.3@-8089.84,2671.26
  Bottom w7.87: CN4-1.3@-8298.5,2491.73 -8269.37,2491.73 J4-1.3@-8089.84,2671.26
CN4-1_P4: CN4-1.4 J4-1.4 | length 1062
  Top w7.87: CN4-1.4@-8377.24,2491.73 -8337.87,2531.1 -8261.5,2531.1 -8236.69,2555.91 -8236.69,2605.91 -8120.94,2721.65 -8040.24,2721.65 J4-1.4@-7989.84,2671.26
  Bottom w7.87: CN4-1.4@-8377.24,2491.73 -8339.06,2529.92 -8263.46,2529.92 -8237.09,2556.3 -8237.09,2600.79 -8117.01,2720.87 -8039.06,2720.87 -8039.06,2720.47 J4-1.4@-7989.84,2671.26
CN4-1_P5: CN4-1.5 J4-1.5 | length 552.5
  Top w7.87: CN4-1.5@-8298.5,2412.99 -8268.98,2412.99 -8113.86,2568.11 -8088.27,2568.11 -8088.27,2569.68 J4-1.5@-8089.84,2571.26
  Bottom w7.87: CN4-1.5@-8298.5,2412.99 -8269.76,2412.99 -8111.5,2571.26 J4-1.5@-8089.84,2571.26
CN4-1_P6: CN4-1.6 J4-1.6 | length 1012.5
  Top w7.87: CN4-1.6@-8377.24,2412.99 -8337.09,2453.15 -8265.04,2453.15 -8247.72,2470.47 -8247.72,2488.98 -8115.43,2621.26 -8115.43,2621.65 -8040.24,2621.65 J4-1.6@-7989.84,2571.26
  Bottom w7.87: CN4-1.6@-8377.24,2412.99 -8336.69,2453.54 -8262.28,2453.54 -8247.72,2468.11 -8247.72,2488.58 -8114.65,2621.65 -8040.24,2621.65 J4-1.6@-7989.84,2571.26
CN4-1_P7: CN4-1.7 J4-1.7 | length 531.1
  Top w7.87: CN4-1.7@-8298.5,2334.25 -8276.06,2334.25 -8139.06,2471.26 J4-1.7@-8089.84,2471.26
  Bottom w7.87: CN4-1.7@-8298.5,2334.25 -8298.11,2333.86 -8278.03,2333.86 -8140.63,2471.26 J4-1.7@-8089.84,2471.26
CN4-1_P8: CN4-1.8 J4-1.8 | length 973.5
  Top w7.87: CN4-1.8@-8377.24,2334.25 -8337.09,2374.41 -8270.16,2374.41 -8123.7,2520.87 -8039.45,2520.87 J4-1.8@-7989.84,2471.26
  Bottom w7.87: CN4-1.8@-8377.24,2334.25 -8337.09,2374.41 -8270.94,2374.41 -8123.7,2521.65 -8036.3,2521.65 -8036.3,2517.72 J4-1.8@-7989.84,2471.26
CN4-1_P9: CN4-1.9 J4-1.9 | length 513.2
  Top w7.87: CN4-1.9@-8298.5,2255.51 -8267.01,2255.51 -8151.26,2371.26 J4-1.9@-8089.84,2371.26
  Bottom w7.87: CN4-1.9@-8298.5,2255.51 -8266.22,2255.51 -8150.47,2371.26 J4-1.9@-8089.84,2371.26
CN4-1_P10: CN4-1.10 J4-1.10 | length 953.2
  Top w7.87: CN4-1.10@-8377.24,2255.51 -8338.27,2294.49 -8275.28,2294.49 -8148.9,2420.87 -8039.45,2420.87 J4-1.10@-7989.84,2371.26
  Bottom w7.87: CN4-1.10@-8377.24,2255.51 -8338.27,2294.49 -8273.31,2294.49 -8146.54,2421.26 -8039.84,2421.26 J4-1.10@-7989.84,2371.26
CN4-1_P11: CN4-1.11 J4-1.11 | length 495.6
  Top w7.87: CN4-1.11@-8298.5,2176.77 -8274.88,2176.77 -8180.39,2271.26 J4-1.11@-8089.84,2271.26
  Bottom w7.87: CN4-1.11@-8298.5,2176.77 -8274.09,2176.77 -8179.61,2271.26 J4-1.11@-8089.84,2271.26
CN4-1_P12: CN4-1.12 J4-1.12 | length 933.8
  Top w7.87: CN4-1.12@-8377.24,2176.77 -8337.87,2216.14 -8278.82,2216.14 -8174.96,2320 -8038.58,2320 J4-1.12@-7989.84,2271.26
  Bottom w7.87: CN4-1.12@-8377.24,2176.77 -8337.87,2216.14 -8279.61,2216.14 -8175.75,2320 -8038.58,2320 J4-1.12@-7989.84,2271.26
CN4-1_P13: CN4-1.13 J4-1.13 | length 480.3
  Top w7.87: CN4-1.13@-8298.5,2098.03 -8270.94,2098.03 -8197.72,2171.26 J4-1.13@-8089.84,2171.26
  Bottom w7.87: CN4-1.13@-8298.5,2098.03 -8270.55,2098.03 -8199.29,2169.29 -8089.06,2169.29 -8089.84,2170.08 J4-1.13@-8089.84,2171.26
CN4-1_P14: CN4-1.14 J4-1.14 | length 916.4
  Top w7.87: CN4-1.14@-8377.24,2098.03 -8337.87,2137.4 -8267.01,2137.4 -8184.72,2219.68 -8038.27,2219.68 J4-1.14@-7989.84,2171.26
  Bottom w7.87: CN4-1.14@-8377.24,2098.03 -8337.87,2137.4 -8266.61,2137.4 -8184.33,2219.68 -8039.84,2219.68 -7990.63,2170.47 J4-1.14@-7989.84,2171.26
CN4-1_P15: CN4-1.15 J4-1.15 | length 492.2
  Top w7.87: CN4-1.15@-8298.5,2019.29 -8267.4,2019.29 -8207.56,2079.13 -8081.97,2079.13 J4-1.15@-8089.84,2071.26
  Bottom w7.87: CN4-1.15@-8298.5,2019.29 -8265.43,2019.29 -8206.38,2078.35 -8090.63,2078.35 -8090.63,2072.05 J4-1.15@-8089.84,2071.26
CN4-1_P16: CN4-1.16 J4-1.16 | length 906.6
  Top w7.87: CN4-1.16@-8377.24,2019.29 -8337.09,2059.45 -8266.22,2059.45 -8200.08,2125.59 -8044.17,2125.59 J4-1.16@-7989.84,2071.26
  Bottom w7.87: CN4-1.16@-8377.24,2019.29 -8336.69,2059.84 -8266.22,2059.84 -8202.05,2124.02 -8042.6,2124.02 J4-1.16@-7989.84,2071.26
CN4-1_P17: CN4-1.17 J4-1.17 | length 471.1
  Top w7.87: CN4-1.17@-8298.5,1940.55 -8235.51,1940.55 -8196.14,1979.92 -8098.5,1979.92 J4-1.17@-8089.84,1971.26
  Bottom w7.87: CN4-1.17@-8298.5,1940.55 -8234.33,1940.55 -8194.17,1980.71 -8084.33,1980.71 -8084.33,1976.77 J4-1.17@-8089.84,1971.26
CN4-1_P18: CN4-1.18 J4-1.18 | length 887
  Top w7.87: CN4-1.18@-8377.24,1940.55 -8337.87,1979.92 -8235.51,1979.92 -8191.81,2023.62 -8042.2,2023.62 J4-1.18@-7989.84,1971.26
  Bottom w7.87: CN4-1.18@-8377.24,1940.55 -8337.09,1980.71 -8235.91,1980.71 -8192.99,2023.62 -8042.2,2023.62 J4-1.18@-7989.84,1971.26
CN4-1_P19: CN4-1.19 J4-1.19 | length 425.2
  Top w7.87: CN4-1.19@-8298.5,1861.81 -8099.29,1861.81 J4-1.19@-8089.84,1871.26
  Bottom w7.87: CN4-1.19@-8298.5,1861.81 -8099.29,1861.81 J4-1.19@-8089.84,1871.26
CN4-1_P20: CN4-1.20 J4-1.20 | length 866.1
  Top w7.87: CN4-1.20@-8377.24,1861.81 -8337.87,1901.18 -8223.7,1901.18 -8203.23,1921.65 -8040.24,1921.65 J4-1.20@-7989.84,1871.26
  Bottom w7.87: CN4-1.20@-8377.24,1861.81 -8374.88,1861.81 -8334.72,1901.97 -8208.35,1901.97 -8188.66,1921.65 -8040.24,1921.65 J4-1.20@-7989.84,1871.26
CN4-1_P21: CN4-1.21 J4-1.21 | length 437.8
  Top w7.87: CN4-1.21@-8298.5,1783.07 -8101.65,1783.07 J4-1.21@-8089.84,1771.26
  Bottom w7.87: CN4-1.21@-8298.5,1783.07 -8120.16,1783.07 -8100.47,1763.39 -8090.63,1763.39 -8089.84,1764.17 J4-1.21@-8089.84,1771.26
CN4-1_P22: CN4-1.22 J4-1.22 | length 857.4
  Top w7.87: CN4-1.22@-8377.24,1783.07 -8337.87,1822.44 -8038.66,1822.44 -7999.29,1783.07 -7999.29,1780.71 J4-1.22@-7989.84,1771.26
  Bottom w7.87: CN4-1.22@-8377.24,1783.07 -8337.09,1823.23 -8036.3,1823.23 -7987.09,1774.02 J4-1.22@-7989.84,1771.26
CN4-1_P23: CN4-1.23 J4-1.23 | length 444.7
  Top w7.87: CN4-1.23@-8298.5,1704.33 -8160.71,1704.33 -8129.21,1672.83 -8091.42,1672.83 J4-1.23@-8089.84,1671.26
  Bottom w7.87: CN4-1.23@-8298.5,1704.33 -8297.72,1703.54 -8158.74,1703.54 -8126.46,1671.26 J4-1.23@-8089.84,1671.26
CN4-1_P24: CN4-1.24 J4-1.24 | length 868.1
  Top w7.87: CN4-1.24@-8377.24,1704.33 -8337.48,1744.09 -8137.48,1744.09 -8115.43,1722.05 -8040.63,1722.05 J4-1.24@-7989.84,1671.26
  Bottom w7.87: CN4-1.24@-8377.24,1704.33 -8337.48,1744.09 -8137.09,1744.09 -8115.04,1722.05 -8040.63,1722.05 J4-1.24@-7989.84,1671.26
CN4-1_P25: CN4-1.25 J4-1.25 | length 462.3
  Top w7.87: CN4-1.25@-8298.5,1625.59 -8178.43,1625.59 -8127.24,1574.41 -8092.99,1574.41 J4-1.25@-8089.84,1571.26
  Bottom w7.87: CN4-1.25@-8298.5,1625.59 -8180,1625.59 -8125.67,1571.26 J4-1.25@-8089.84,1571.26
CN4-1_P26: CN4-1.26 J4-1.26 | length 888.9
  Top w7.87: CN4-1.26@-8377.24,1625.59 -8337.87,1664.96 -8184.33,1664.96 -8141.02,1621.65 -8038.66,1621.65 -8007.17,1590.16 -8007.17,1588.58 J4-1.26@-7989.84,1571.26
  Bottom w7.87: CN4-1.26@-8377.24,1625.59 -8337.09,1665.75 -8183.94,1665.75 -8141.02,1622.83 -8037.48,1622.83 -7993.78,1579.13 -7993.78,1575.2 J4-1.26@-7989.84,1571.26
CN4-1_P27: CN4-1.27 J4-1.27 | length 479.9
  Top w7.87: CN4-1.27@-8298.5,1546.85 -8235.51,1546.85 -8159.92,1471.26 J4-1.27@-8089.84,1471.26
  Bottom w7.87: CN4-1.27@-8298.5,1546.85 -8234.33,1546.85 -8158.74,1471.26 J4-1.27@-8089.84,1471.26
CN4-1_P28: CN4-1.28 J4-1.28 | length 902.7
  Top w7.87: CN4-1.28@-8377.24,1546.85 -8337.87,1586.22 -8196.14,1586.22 -8129.21,1519.29 -8037.87,1519.29 J4-1.28@-7989.84,1471.26
  Bottom w7.87: CN4-1.28@-8377.24,1546.85 -8337.87,1586.22 -8194.96,1586.22 -8128.43,1519.68 -8038.27,1519.68 J4-1.28@-7989.84,1471.26
CN4-1_P29: CN4-1.29 J4-1.29 | length 497.6
  Top w7.87: CN4-1.29@-8298.5,1468.11 -8255.2,1468.11 -8158.35,1371.26 J4-1.29@-8089.84,1371.26
  Bottom w7.87: CN4-1.29@-8298.5,1468.11 -8256.38,1468.11 -8159.53,1371.26 J4-1.29@-8089.84,1371.26
CN4-1_P30: CN4-1.30 J4-1.30 | length 920.9
  Top w7.87: CN4-1.30@-8377.24,1468.11 -8337.87,1507.48 -8235.51,1507.48 -8152.83,1424.8 -8043.39,1424.8 J4-1.30@-7989.84,1371.26
  Bottom w7.87: CN4-1.30@-8377.24,1468.11 -8337.09,1508.27 -8235.91,1508.27 -8152.44,1424.8 -8043.39,1424.8 J4-1.30@-7989.84,1371.26
CN4-1_P31: CN4-1.31 J4-1.31 | length 522.4
  Top w7.87: CN4-1.31@-8298.5,1389.37 -8259.13,1389.37 -8141.02,1271.26 J4-1.31@-8089.84,1271.26
  Bottom w7.87: CN4-1.31@-8298.5,1389.37 -8258.35,1389.37 -8139.06,1270.08 J4-1.31@-8088.66,1270.08 ; J4-1.31@-8089.84,1271.26 J4-1.31@-8088.66,1270.08 ; J4-1.31@-8084.72,1270.08 J4-1.31@-8088.66,1270.08
CN4-1_P32: CN4-1.32 J4-1.32 | length 937.9
  Top w7.87: CN4-1.32@-8377.24,1389.37 -8337.87,1428.74 -8255.2,1428.74 -8148.5,1322.05 -8040.63,1322.05 J4-1.32@-7989.84,1271.26
  Bottom w7.87: CN4-1.32@-8377.24,1389.37 -8337.87,1428.74 -8254.8,1428.74 -8148.9,1322.83 -8041.42,1322.83 J4-1.32@-7989.84,1271.26
CN4-1_P33: CN4-1.33 J4-1.33 | length 537.3
  Top w7.87: CN4-1.33@-8298.5,1310.63 -8255.2,1310.63 -8117.4,1172.83 -8091.42,1172.83 J4-1.33@-8089.84,1171.26
  Bottom w7.87: CN4-1.33@-8298.5,1310.63 -8255.2,1310.63 -8110.31,1165.75 -8095.35,1165.75 J4-1.33@-8089.84,1171.26
CN4-1_P34: CN4-1.34 J4-1.34 | length 953.9
  Top w7.87: CN4-1.34@-8377.24,1310.63 -8339.06,1348.82 -8250.08,1348.82 -8125.28,1224.02 -8042.6,1224.02 J4-1.34@-7989.84,1171.26
  Bottom w7.87: CN4-1.34@-8377.24,1310.63 -8338.66,1349.21 -8250.47,1349.21 -8125.28,1224.02 -8042.6,1224.02 J4-1.34@-7989.84,1171.26
CN4-1_P35: CN4-1.35 J4-1.35 | length 550.4
  Top w7.87: CN4-1.35@-8298.5,1231.89 -8250.47,1231.89 J4-1.35@-8089.84,1071.26
  Bottom w7.87: CN4-1.35@-8298.5,1231.89 -8250.47,1231.89 J4-1.35@-8089.84,1071.26
CN4-1_P36: CN4-1.36 J4-1.36 | length 973.4
  Top w7.87: CN4-1.36@-8377.24,1231.89 -8337.87,1271.26 -8259.13,1271.26 -8109.53,1121.65 -8040.24,1121.65 J4-1.36@-7989.84,1071.26
  Bottom w7.87: CN4-1.36@-8377.24,1231.89 -8337.48,1271.65 -8260.71,1271.65 -8109.92,1120.87 -8039.45,1120.87 J4-1.36@-7989.84,1071.26
CN4-1_P37: CN4-1.37 J4-1.37 | length 569.2
  Top w7.87: CN4-1.37@-8298.5,1153.15 -8293.39,1148.03 -8293.39,1146.06 -8118.58,971.26 J4-1.37@-8089.84,971.26
  Bottom w7.87: CN4-1.37@-8298.5,1153.15 -8116.61,971.26 J4-1.37@-8089.84,971.26
CN4-1_P38: CN4-1.38 J4-1.38 | length 1038.9
  Top w7.87: CN4-1.38@-8377.24,1153.15 -8337.87,1192.52 -8263.46,1192.52 -8213.86,1142.91 -8213.86,1101.97 -8135.12,1023.23 -8041.81,1023.23 J4-1.38@-7989.84,971.26
  Bottom w7.87: CN4-1.38@-8377.24,1153.15 -8370.94,1159.45 -8370.94,1159.84 -8338.27,1192.52 -8262.28,1192.52 -8215.04,1145.28 -8215.04,1104.33 -8133.94,1023.23 -8041.81,1023.23 J4-1.38@-7989.84,971.26
CN4-1_P39: CN4-1.39 J4-1.39 | length 585.6
  Top w7.87: CN4-1.39@-8298.5,1074.41 -8121.34,897.24 -8115.83,897.24 J4-1.39@-8089.84,871.26
  Bottom w7.87: CN4-1.39@-8298.5,1074.41 -8292.99,1074.41 J4-1.39@-8089.84,871.26
CN4-1_P40: CN4-1.40 J4-1.40 | length 1067
  Top w7.87: CN4-1.40@-8377.24,1074.41 -8121.34,818.5 -8015.04,818.5 -7989.84,843.7 J4-1.40@-7989.84,871.26
  Bottom w7.87: CN4-1.40@-8377.24,1074.41 -8124.49,821.65 -8014.25,821.65 -7983.54,852.36 -7983.54,870.08 -7988.66,870.08 J4-1.40@-7989.84,871.26
CN4-2_P1: CN4-2.1 J4-2.1 | length 558.3
  Top w7.87: CN4-2.1@-7455.12,2301.02 -7285.83,2470.32 J4-2.1@-7253.15,2470.32
  Bottom w7.87: CN4-2.1@-7455.12,2301.02 -7290.94,2465.2 -7263.39,2465.2 -7263.39,2478.19 -7255.51,2470.32 J4-2.1@-7253.15,2470.32
CN4-2_P2: CN4-2.2 J4-2.2 | length 1007.7
  Top w7.87: CN4-2.2@-7533.86,2301.02 -7301.57,2533.31 -7216.14,2533.31 J4-2.2@-7153.15,2470.32
  Bottom w7.87: CN4-2.2@-7533.86,2301.02 -7299.61,2535.28 -7218.11,2535.28 J4-2.2@-7153.15,2470.32
CN4-2_P3: CN4-2.3 J4-2.3 | length 551.3
  Top w7.87: CN4-2.3@-7455.12,2222.28 -7431.5,2222.28 -7283.46,2370.32 J4-2.3@-7253.15,2370.32
  Bottom w7.87: CN4-2.3@-7431.5,2222.28 CN4-2.3@-7455.12,2222.28 -7451.57,2225.83 -7428.74,2225.83 -7286.61,2367.95 -7285.24,2366.57 -7256.89,2366.57 J4-2.3@-7253.15,2370.32
CN4-2_P4: CN4-2.4 J4-2.4 | length 1007.9
  Top w7.87: CN4-2.4@-7533.86,2222.28 -7494.09,2262.05 -7435.83,2262.05 -7278.74,2419.13 -7175.59,2419.13 -7153.15,2396.69 J4-2.4@-7153.15,2370.32
  Bottom w7.87: CN4-2.4@-7533.86,2222.28 -7493.7,2262.44 -7437.01,2262.44 -7279.92,2419.53 -7171.65,2419.53 -7145.67,2393.54 -7145.67,2372.68 -7148.03,2370.32 J4-2.4@-7153.15,2370.32
CN4-2_P5: CN4-2.5 J4-2.5 | length 509
  Top w7.87: CN4-2.5@-7455.12,2143.54 -7433.86,2143.54 -7307.09,2270.32 J4-2.5@-7253.15,2270.32
  Bottom w7.87: CN4-2.5@-7455.12,2143.54 -7436.22,2143.54 -7309.45,2270.32 J4-2.5@-7253.15,2270.32